# Altium PCB dc_power_module_v1.PcbDoc (part 3 of 4)
Units mm, origin at the board's own origin, x right, y up, seen from the top; angles counter-clockwise.
Board outline 83.82 x 73.41 mm, 2 copper layers (Top Layer, Bottom Layer); 37 components, 20 nets, 131 pads, 21 vias.
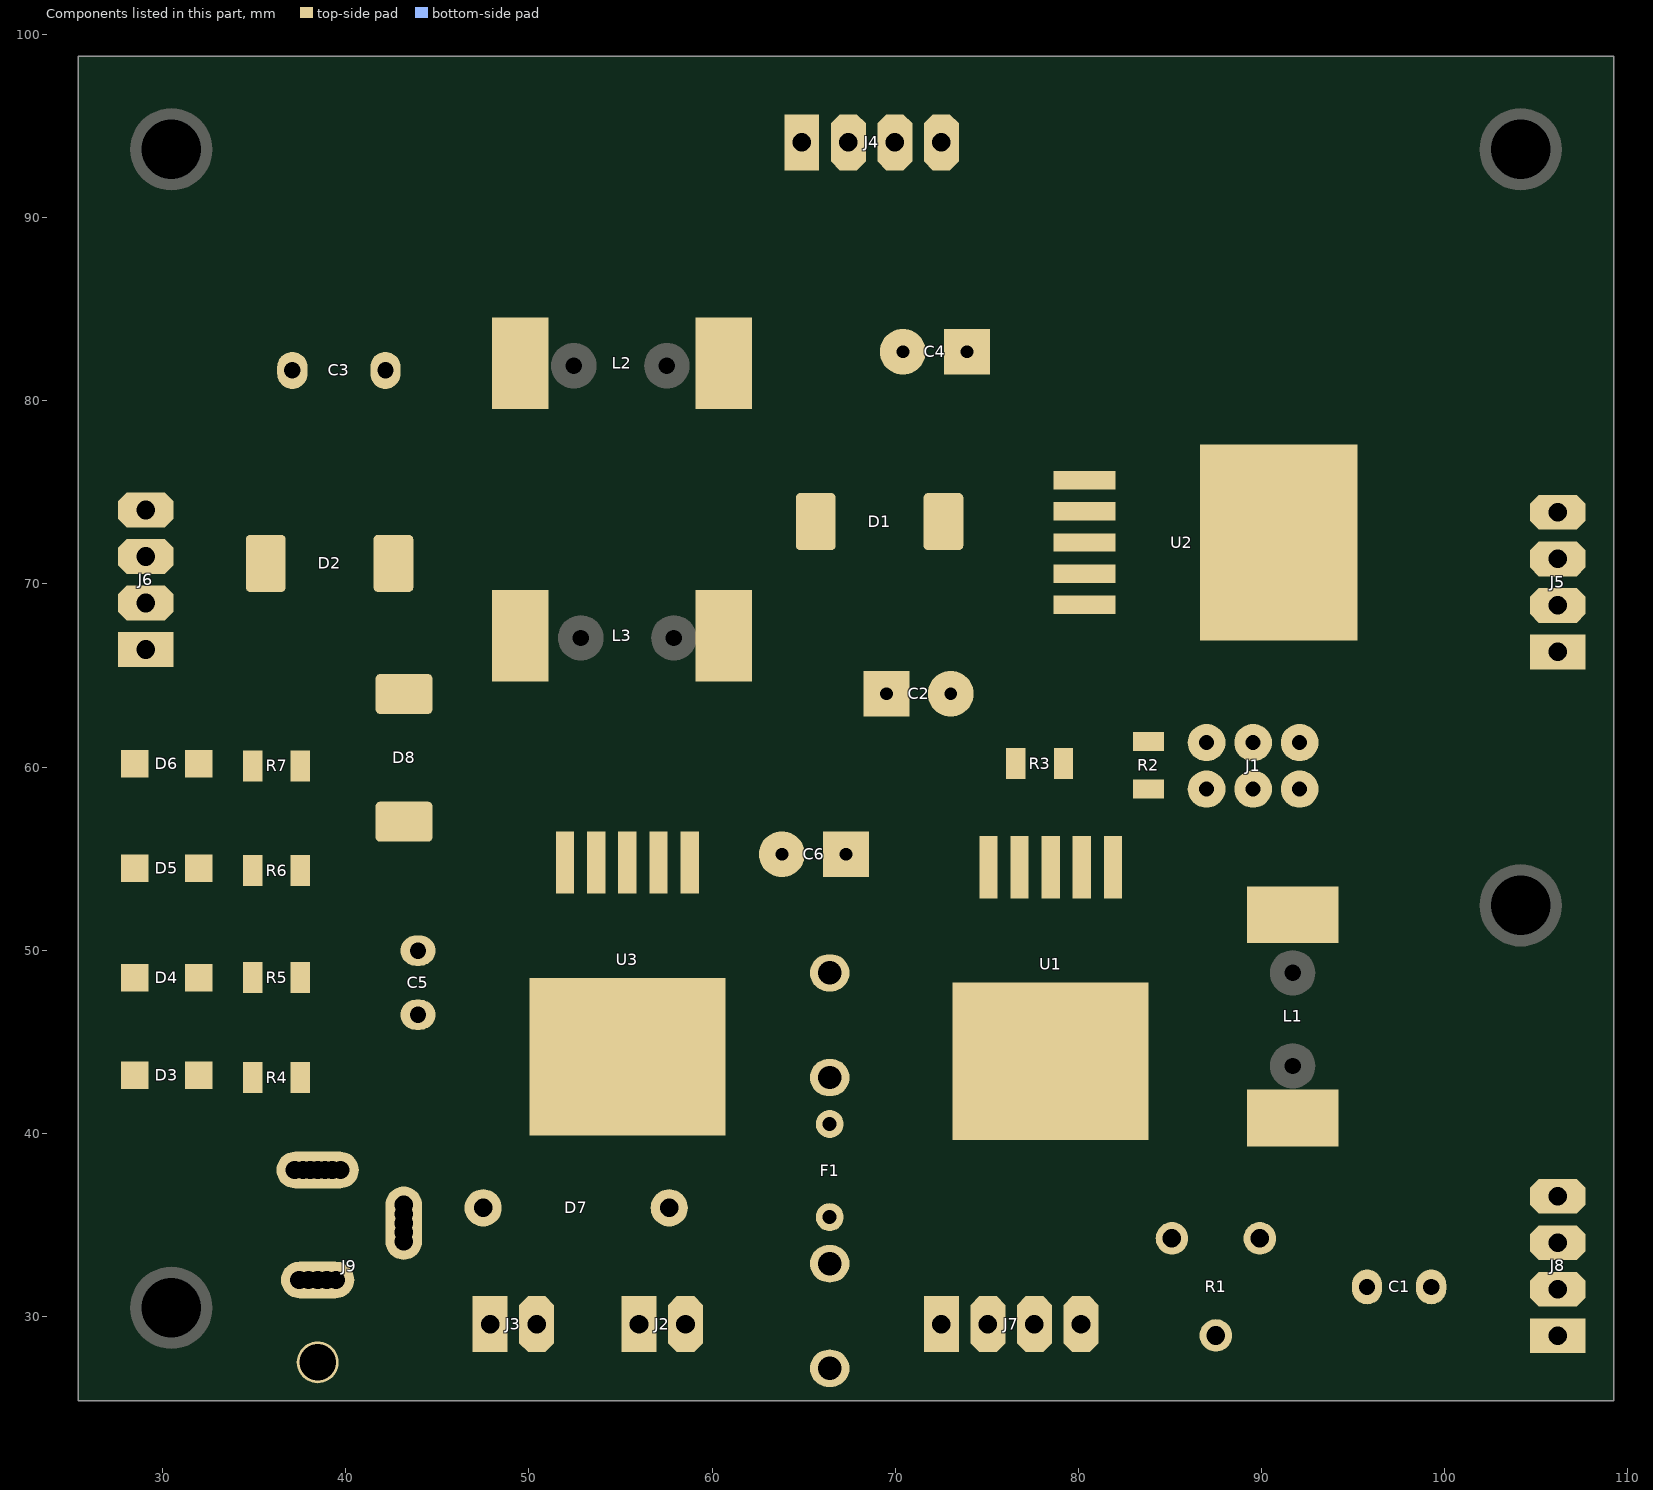
[diagram p3: the components of this part, seen from the top]

## Via types
v1: diameter 1.27, hole 0.711, Top Layer to Bottom Layer, 21 vias

## Nets (pads, with @x,y where several pads share a name; then routed paths per layer and width w, separated by ;. In a path a pad name is that pad's centre, name@x,y a point inside that pad or via, vN(x,y) a via of type N, cw(c..) or ccw(c..) an arc to the next point about the centre after c; other vN are vias at no path point) (continued)
copper on no net: (continued)
  Top Layer w0.008: 41.577,88.79 41.645,88.79 ; 41.577,88.988 41.699,88.988 ; 41.577,89.171 41.699,89.171 ; 41.577,89.254 41.706,89.254 ; 41.577,89.513 41.699,89.513 ; 41.577,89.696 41.699,89.696 ; 41.577,90.039 41.699,90.039 ; 41.577,90.222 41.699,90.222 ; 41.577,93.095 42.803,93.095 ; 41.577,95.823 41.699,95.823 ; 41.584,89.178 41.691,89.178 ; 41.584,89.247 41.691,89.247 ; 41.584,89.437 41.691,89.437 ; 41.584,89.772 41.691,89.772 ; 41.584,89.963 41.691,89.963 ; 41.584,95.83 41.706,95.83 ; 41.592,88.98 41.683,88.98 ; 41.592,89.506 41.683,89.506 ; 41.592,89.704 41.683,89.704 ; 41.592,90.032 41.691,90.032 ; 41.592,90.23 41.683,90.23 ; 41.592,95.838 41.714,95.838 ; 41.599,89.239 41.676,89.239 ; 41.599,89.445 41.676,89.445 ; 41.599,89.765 41.676,89.765 ; 41.599,89.971 41.676,89.971 ; 41.599,93.102 42.819,93.102 ; 41.599,95.846 41.721,95.846 ; 41.599,95.853 41.721,95.853 ; 41.607,89.186 41.668,89.186 ; 41.607,90.024 41.668,90.024 ; 41.607,92.371 43.451,92.371 ; 41.607,95.861 41.729,95.861 ; 41.615,89.498 41.66,89.498 ; 41.615,89.712 41.66,89.712 ; 41.615,90.237 41.66,90.237 ; 41.615,95.868 41.737,95.868 ; 41.622,95.876 41.744,95.876 ; 41.63,88.767 41.737,88.767 ; 41.63,93.11 42.834,93.11 ; 41.63,95.884 41.752,95.884 ; 41.63,95.891 41.76,95.891 ; 41.638,95.899 41.767,95.899 ; 41.645,95.907 41.775,95.907 ; 41.653,95.914 41.782,95.914 ; 41.66,88.759 41.737,88.759 ; 41.66,93.118 42.857,93.118 ; 41.66,95.922 41.79,95.922 ; 41.66,95.929 41.798,95.929 ; 41.668,88.469 41.706,88.469 ; 41.668,88.751 41.737,88.751 ; 41.668,95.937 41.805,95.937 ; 41.676,95.945 41.813,95.945 ; 41.683,88.477 41.714,88.477 ; 41.683,88.744 41.737,88.744 ; 41.683,93.125 42.872,93.125 ; 41.683,95.952 41.82,95.952 ; 41.691,88.485 41.721,88.485 ; 41.691,88.736 41.737,88.736 ; 41.691,92.379 43.489,92.379 ; 41.691,95.96 41.828,95.96 ; 41.699,88.492 41.729,88.492 ; 41.699,88.721 41.737,88.721 ; 41.699,88.729 41.737,88.729 ; 41.699,95.968 41.836,95.968 ; 41.699,95.975 41.843,95.975 ; 41.706,88.5 41.737,88.5 ; 41.706,88.713 41.737,88.713 ; 41.706,88.774 41.737,88.774 ; 41.706,95.983 41.851,95.983 ; 41.714,88.508 41.744,88.508 ; 41.714,88.698 41.737,88.698 ; 41.714,88.706 41.737,88.706 ; 41.714,88.782 41.737,88.782 ; 41.714,88.79 41.729,88.79 ; 41.714,93.133 42.887,93.133 ; 41.714,95.99 41.859,95.99 ; 41.721,88.515 41.744,88.515 ; 41.721,88.675 41.737,88.675 ; 41.721,88.683 41.737,88.683 ; 41.721,88.69 41.737,88.69 ; 41.721,95.998 41.866,95.998 ; 41.729,88.523 41.744,88.523 ; 41.729,88.53 41.737,88.53 ; 41.729,96.006 41.874,96.006 ; 41.737,93.141 42.903,93.141 ; 41.737,96.013 41.881,96.013 ; 41.744,96.021 41.889,96.021 ; 41.744,96.029 41.897,96.029 ; 41.752,96.036 41.904,96.036 ; 41.76,93.148 42.918,93.148 ; 41.76,96.044 41.912,96.044 ; 41.767,92.386 43.527,92.386 ; 41.767,96.051 41.92,96.051 ; 41.775,96.059 41.927,96.059 ; 41.782,96.067 41.942,96.067 ; 41.79,89.582 42.003,89.582 ; 41.79,89.59 42.011,89.59 ; 41.79,89.597 42.011,89.597 ; 41.79,89.605 42.011,89.605 ; 41.79,89.612 42.011,89.612 ; 41.79,89.62 42.011,89.62 ; 41.79,89.628 42.003,89.628 ; 41.79,90.108 42.003,90.108 ; 41.79,90.115 42.011,90.115 ; 41.79,90.123 42.011,90.123 ; 41.79,90.131 42.011,90.131 ; 41.79,90.138 42.011,90.138 ; 41.79,90.146 42.011,90.146 ; 41.79,90.153 42.003,90.153 ; 41.79,93.156 42.933,93.156 ; 41.79,96.074 41.95,96.074 ; 41.798,89.559 42.003,89.559 ; 41.798,89.567 42.003,89.567 ; 41.798,89.574 42.003,89.574 ; 41.798,89.635 42.003,89.635 ; 41.798,89.643 42.003,89.643 ; 41.798,89.651 42.003,89.651 ; 41.798,90.085 42.003,90.085 ; 41.798,90.093 42.003,90.093 ; 41.798,90.1 42.003,90.1 ; 41.798,90.161 42.003,90.161 ; 41.798,90.169 42.003,90.169 ; 41.798,90.176 42.003,90.176 ; 41.798,96.082 41.958,96.082 ; 41.805,89.544 41.988,89.544 ; 41.805,89.552 41.996,89.552 ; 41.805,89.658 41.996,89.658 ; 41.805,89.666 41.988,89.666 ; 41.805,90.07 41.996,90.07 ; 41.805,90.077 41.996,90.077 ; 41.805,90.184 41.996,90.184 ; 41.805,90.192 41.988,90.192 ; 41.805,96.089 41.965,96.089 ; 41.805,96.097 41.973,96.097 ; 41.813,89.536 41.988,89.536 ; 41.813,89.673 41.988,89.673 ; 41.813,90.062 41.988,90.062 ; 41.813,90.199 41.988,90.199 ; 41.813,93.163 42.948,93.163 ; 41.813,96.105 41.98,96.105 ; 41.82,89.529 41.98,89.529 ; 41.82,89.681 41.98,89.681 ; 41.82,90.054 41.98,90.054 ; 41.82,90.207 41.98,90.207 ; 41.82,96.112 41.988,96.112 ; 41.828,89.521 41.973,89.521 ; 41.828,89.689 41.973,89.689 ; 41.828,90.047 41.973,90.047 ; 41.828,90.214 41.973,90.214 ; 41.828,96.12 42.003,96.12 ; 41.836,89.513 41.965,89.513 ; 41.836,89.696 41.965,89.696 ; 41.836,90.039 41.965,90.039 ; 41.836,90.222 41.958,90.222 ; 41.836,92.394 43.558,92.394 ; 41.836,93.171 42.963,93.171 ; 41.836,96.128 42.011,96.128 ; 41.843,96.135 42.019,96.135 ; 41.851,89.506 41.95,89.506 ; 41.851,89.704 41.95,89.704 ; 41.851,90.032 41.95,90.032 ; 41.851,90.23 41.95,90.23 ; 41.851,96.143 42.026,96.143 ; 41.859,93.179 42.979,93.179 ; 41.859,96.15 42.034,96.15 ; 41.866,96.158 42.049,96.158 ; 41.874,89.498 41.927,89.498 ; 41.874,89.712 41.927,89.712 ; 41.874,90.024 41.927,90.024 ; 41.874,90.237 41.92,90.237 ; 41.874,96.166 42.057,96.166 ; 41.881,93.186 42.986,93.186 ; 41.881,96.173 42.064,96.173 ; 41.889,96.181 42.072,96.181 ; 41.897,92.401 43.596,92.401 ; 41.897,96.189 42.087,96.189 ; 41.904,93.194 43.002,93.194 ; 41.904,96.196 42.095,96.196 ; 41.912,96.204 42.102,96.204 ; 41.92,96.211 42.11,96.211 ; 41.927,93.201 43.017,93.201 ; 41.927,96.219 42.125,96.219 ; 41.935,96.227 42.133,96.227 ; 41.942,96.234 42.141,96.234 ; 41.95,93.209 43.032,93.209 ; 41.95,96.242 42.156,96.242 ; 41.958,92.409 43.626,92.409 ; 41.958,96.249 42.163,96.249 ; 41.965,96.257 42.171,96.257 ; 41.973,93.217 43.04,93.217 ; 41.973,96.265 42.186,96.265 ; 41.98,88.706 41.996,88.706 ; 41.98,88.713 41.996,88.713 ; 41.98,88.721 41.996,88.721 ; 41.98,88.729 42.003,88.729 ; 41.98,88.736 42.003,88.736 ; 41.98,88.744 42.011,88.744 ; 41.98,88.751 42.026,88.751 ; 41.98,88.759 42.262,88.759 ; 41.98,88.767 42.262,88.767 ; 41.98,88.774 42.262,88.774 ; 41.98,88.782 42.262,88.782 ; 41.98,96.272 42.194,96.272 ; 41.988,93.224 43.055,93.224 ; 41.988,96.28 42.201,96.28 ; 41.996,96.288 42.217,96.288 ; 42.003,96.295 42.224,96.295 ; 42.011,93.232 43.07,93.232 ; 42.011,96.303 42.24,96.303 ; 42.019,92.417 43.657,92.417 ; 42.019,96.31 42.247,96.31 ; 42.026,96.318 42.262,96.318 ; 42.034,93.24 43.078,93.24 ; 42.041,96.326 42.27,96.326 ; 42.049,89.597 42.27,89.597 ; 42.049,89.605 42.27,89.605 ; 42.049,89.612 42.27,89.612 ; 42.049,90.115 42.27,90.115 ; 42.049,90.123 42.27,90.123 ; 42.049,90.131 42.27,90.131 ; 42.049,90.138 42.27,90.138 ; 42.049,93.247 43.093,93.247 ; 42.049,96.333 42.278,96.333 ; 42.057,89.567 42.262,89.567 ; 42.057,89.574 42.262,89.574 ; 42.057,89.582 42.27,89.582 ; 42.057,89.59 42.27,89.59 ; 42.057,89.62 42.27,89.62 ; 42.057,89.628 42.27,89.628 ; 42.057,89.635 42.262,89.635 ; 42.057,89.643 42.262,89.643 ; 42.057,90.093 42.262,90.093 ; 42.057,90.1 42.262,90.1 ; 42.057,90.108 42.27,90.108 ; 42.057,90.146 42.27,90.146 ; 42.057,90.153 42.27,90.153 ; 42.057,90.161 42.262,90.161 ; 42.057,90.169 42.262,90.169 ; 42.057,96.341 42.293,96.341 ; 42.064,89.552 42.255,89.552 ; 42.064,89.559 42.262,89.559 ; 42.064,89.651 42.262,89.651 ; 42.064,89.658 42.255,89.658 ; 42.064,90.077 42.255,90.077 ; 42.064,90.085 42.262,90.085 ; 42.064,90.176 42.262,90.176 ; 42.064,90.184 42.255,90.184 ; 42.064,96.349 42.301,96.349 ; 42.072,89.536 42.247,89.536 ; 42.072,89.544 42.255,89.544 ; 42.072,89.666 42.255,89.666 ; 42.072,89.673 42.247,89.673 ; 42.072,90.062 42.247,90.062 ; 42.072,90.07 42.255,90.07 ; 42.072,90.192 42.255,90.192 ; 42.072,90.199 42.247,90.199 ; 42.072,92.424 43.687,92.424 ; 42.072,93.255 43.108,93.255 ; 42.072,96.356 42.316,96.356 ; 42.08,89.529 42.24,89.529 ; 42.08,89.681 42.24,89.681 ; 42.08,90.054 42.24,90.054 ; 42.08,90.207 42.24,90.207 ; 42.08,96.364 42.323,96.364 ; 42.087,88.469 42.148,88.469 ; 42.087,88.477 42.148,88.477 ; 42.087,88.485 42.148,88.485 ; 42.087,89.521 42.232,89.521 ; 42.087,89.689 42.232,89.689 ; 42.087,90.047 42.232,90.047 ; 42.087,90.214 42.232,90.214 ; 42.087,93.262 43.116,93.262 ; 42.087,96.371 42.339,96.371 ; 42.095,88.492 42.148,88.492 ; 42.095,88.5 42.148,88.5 ; 42.095,88.508 42.148,88.508 ; 42.095,88.515 42.148,88.515 ; 42.095,88.523 42.148,88.523 ; 42.095,88.53 42.148,88.53 ; 42.095,88.538 42.148,88.538 ; 42.095,88.546 42.148,88.546 ; 42.095,88.553 42.148,88.553 ; 42.095,88.561 42.148,88.561 ; 42.095,88.569 42.148,88.569 ; 42.095,88.576 42.148,88.576 ; 42.095,88.584 42.148,88.584 ; 42.095,88.591 42.148,88.591 ; 42.095,88.599 42.148,88.599 ; 42.095,88.607 42.148,88.607 ; 42.095,88.614 42.148,88.614 ; 42.095,88.622 42.148,88.622 ; 42.095,88.629 42.148,88.629 ; 42.095,88.637 42.148,88.637 ; 42.095,88.645 42.148,88.645 ; 42.095,88.652 42.148,88.652 ; 42.095,88.66 42.148,88.66 ; 42.095,88.668 42.148,88.668 ; 42.095,88.675 42.148,88.675 ; 42.095,88.683 42.148,88.683 ; 42.095,88.69 42.148,88.69 ; 42.095,88.698 42.148,88.698 ; 42.095,88.706 42.148,88.706 ; 42.095,88.713 42.148,88.713 ; 42.095,88.721 42.148,88.721 ; 42.095,88.729 42.148,88.729 ; 42.095,88.736 42.148,88.736 ; 42.095,88.744 42.148,88.744 ; 42.095,88.751 42.148,88.751 ; 42.095,90.039 42.224,90.039 ; 42.095,96.379 42.354,96.379 ; 42.102,89.513 42.224,89.513 ; 42.102,89.696 42.224,89.696 ; 42.102,90.222 42.224,90.222 ; 42.11,89.506 42.209,89.506 ; 42.11,89.704 42.209,89.704 ; 42.11,90.032 42.209,90.032 ; 42.11,90.23 42.209,90.23 ; 42.11,93.27 43.131,93.27 ; 42.11,96.387 42.361,96.387 ; 42.118,92.432 43.718,92.432 ; 42.118,96.394 42.377,96.394 ; 42.125,93.278 43.139,93.278 ; 42.125,94.268 42.255,94.268 ; 42.125,96.402 42.384,96.402 ; 42.133,89.498 42.186,89.498 ; 42.133,89.712 42.186,89.712 ; 42.133,90.024 42.186,90.024 ; 42.133,94.261 42.331,94.261 ; 42.133,96.41 42.4,96.41 ; 42.141,90.237 42.186,90.237 ; 42.141,93.285 43.146,93.285 ; 42.141,96.417 42.415,96.417 ; 42.148,94.253 42.384,94.253 ; 42.148,96.425 42.422,96.425 ; 42.163,93.293 43.162,93.293 ; 42.163,94.245 42.43,94.245 ; 42.163,96.432 42.438,96.432 ; 42.171,92.439 43.748,92.439 ; 42.171,96.44 42.453,96.44 ; 42.179,93.301 43.169,93.301 ; 42.179,96.448 42.461,96.448 ; 42.186,94.238 42.476,94.238 ; 42.186,96.455 42.476,96.455 ; 42.194,93.308 43.177,93.308 ; 42.201,94.23 42.514,94.23 ; 42.201,96.463 42.491,96.463 ; 42.209,93.316 43.192,93.316 ; 42.209,96.47 42.506,96.47 ; 42.217,88.751 42.262,88.751 ; 42.217,92.447 43.779,92.447 ; 42.217,94.223 42.552,94.223 ; 42.217,96.478 42.514,96.478 ; 42.224,88.744 42.262,88.744 ; 42.224,93.323 43.2,93.323 ; 42.224,96.486 42.529,96.486 ; 42.232,88.736 42.262,88.736 ; 42.24,88.721 42.262,88.721 ; 42.24,88.729 42.262,88.729 ; 42.24,93.331 43.207,93.331 ; 42.24,94.215 42.582,94.215 ; 42.24,96.493 42.544,96.493 ; 42.247,88.706 42.262,88.706 ; 42.247,88.713 42.262,88.713 ; 42.247,96.501 42.56,96.501 ; 42.255,93.339 43.223,93.339 ; 42.255,94.207 42.621,94.207 ; 42.255,96.509 42.575,96.509 ; 42.262,92.455 43.809,92.455 ; 42.27,93.346 43.23,93.346 ; 42.27,94.2 42.651,94.2 ; 42.27,96.516 42.59,96.516 ; 42.278,96.524 42.605,96.524 ; 42.285,93.354 43.238,93.354 ; 42.285,94.192 42.674,94.192 ; 42.285,96.531 42.621,96.531 ; 42.293,96.539 42.636,96.539 ; 42.301,93.362 43.245,93.362 ; 42.301,94.184 42.704,94.184 ; 42.308,92.462 43.84,92.462 ; 42.308,96.547 42.651,96.547 ; 42.316,89.498 42.864,89.498 ; 42.316,89.506 42.857,89.506 ; 42.316,89.513 42.849,89.513 ; 42.316,89.521 42.842,89.521 ; 42.316,89.529 42.834,89.529 ; 42.316,89.536 42.826,89.536 ; 42.316,89.544 42.819,89.544 ; 42.316,89.552 42.803,89.552 ; 42.316,89.559 42.796,89.559 ; 42.316,89.567 42.788,89.567 ; 42.316,89.574 42.773,89.574 ; 42.316,89.582 42.781,89.582 ; 42.316,89.59 42.796,89.59 ; 42.316,89.597 42.819,89.597 ; 42.316,89.605 42.834,89.605 ; 42.316,89.612 42.849,89.612 ; 42.316,89.62 42.864,89.62 ; 42.316,89.628 42.872,89.628 ; 42.316,89.635 42.887,89.635 ; 42.316,89.643 42.903,89.643 ; 42.316,89.651 42.91,89.651 ; 42.316,89.658 42.918,89.658 ; 42.316,89.666 42.933,89.666 ; 42.316,89.673 42.941,89.673 ; 42.316,89.681 42.948,89.681 ; 42.316,89.689 42.963,89.689 ; 42.316,89.696 42.971,89.696 ; 42.316,89.704 42.979,89.704 ; 42.316,89.712 42.986,89.712 ; 42.316,90.024 42.979,90.024 ; 42.316,90.032 42.971,90.032 ; 42.316,90.039 42.963,90.039 ; 42.316,90.047 42.956,90.047 ; 42.316,90.054 42.948,90.054 ; 42.316,90.062 42.941,90.062 ; 42.316,90.07 42.925,90.07 ; 42.316,90.077 42.918,90.077 ; 42.316,90.085 42.91,90.085 ; 42.316,90.093 42.895,90.093 ; 42.316,90.1 42.88,90.1 ; 42.316,90.108 42.872,90.108 ; 42.316,90.115 42.857,90.115 ; 42.316,90.123 42.842,90.123 ; 42.316,90.131 42.826,90.131 ; 42.316,90.138 42.811,90.138 ; 42.316,90.146 42.796,90.146 ; 42.316,90.153 42.773,90.153 ; 42.316,90.161 42.758,90.161 ; 42.316,90.169 42.735,90.169 ; 42.316,90.176 42.712,90.176 ; 42.316,90.184 42.689,90.184 ; 42.316,90.192 42.659,90.192 ; 42.316,90.199 42.628,90.199 ; 42.316,90.207 42.598,90.207 ; 42.316,90.214 42.56,90.214 ; 42.316,90.222 42.514,90.222 ; 42.316,90.23 42.461,90.23 ; 42.316,90.237 42.361,90.237 ; 42.316,93.369 43.253,93.369 ; 42.316,96.554 42.666,96.554 ; 42.323,94.177 42.735,94.177 ; 42.331,93.377 43.261,93.377 ; 42.331,96.562 42.682,96.562 ; 42.339,94.169 42.758,94.169 ; 42.339,96.57 42.697,96.57 ; 42.346,92.47 43.863,92.47 ; 42.346,93.384 43.268,93.384 ; 42.346,96.577 42.712,96.577 ; 42.354,93.392 43.276,93.392 ; 42.354,94.162 42.788,94.162 ; 42.361,96.585 42.727,96.585 ; 42.369,93.4 43.284,93.4 ; 42.369,94.154 42.811,94.154 ; 42.369,96.592 42.742,96.592 ; 42.377,89.491 42.872,89.491 ; 42.384,93.407 43.291,93.407 ; 42.384,94.146 42.834,94.146 ; 42.384,96.6 42.765,96.6 ; 42.392,92.478 43.893,92.478 ; 42.392,93.415 43.299,93.415 ; 42.392,96.608 42.781,96.608 ; 42.4,94.139 42.857,94.139 ; 42.4,96.615 42.796,96.615 ; 42.407,93.422 43.306,93.422 ; 42.415,94.131 42.88,94.131 ; 42.415,96.623 42.811,96.623 ; 42.422,90.016 42.986,90.016 ; 42.422,93.43 43.314,93.43 ; 42.422,96.63 42.834,96.63 ; 42.43,89.483 42.88,89.483 ; 42.43,89.719 42.994,89.719 ; 42.43,92.485 43.916,92.485 ; 42.43,93.438 43.322,93.438 ; 42.43,94.124 42.903,94.124 ; 42.438,96.638 42.849,96.638 ; 42.445,93.445 43.329,93.445 ; 42.445,94.116 42.925,94.116 ; 42.445,96.646 42.872,96.646 ; 42.453,93.453 43.337,93.453 ; 42.461,89.475 42.887,89.475 ; 42.461,94.108 42.948,94.108 ; 42.461,96.653 42.887,96.653 ; 42.468,92.493 43.939,92.493 ; 42.468,93.461 43.344,93.461 ; 42.476,93.468 43.352,93.468 ; 42.476,94.101 42.963,94.101 ; 42.476,96.661 42.91,96.661 ; 42.483,88.774 42.697,88.774 ; 42.483,88.782 42.666,88.782 ; 42.483,96.669 42.925,96.669 ; 42.491,89.468 42.895,89.468 ; 42.491,93.476 43.352,93.476 ; 42.491,94.093 42.986,94.093 ; 42.499,90.009 42.994,90.009 ; 42.499,93.483 43.36,93.483 ; 42.499,94.085 43.002,94.085 ; 42.499,96.676 42.948,96.676 ; 42.506,88.767 42.712,88.767 ; 42.506,92.5 43.969,92.5 ; 42.506,93.491 43.367,93.491 ; 42.506,96.684 42.963,96.684 ; 42.514,89.46 42.903,89.46 ; 42.514,89.727 42.994,89.727 ; 42.514,94.078 43.024,94.078 ; 42.522,88.469 42.59,88.469 ; 42.522,88.759 42.72,88.759 ; 42.522,93.499 43.375,93.499 ; 42.522,96.691 42.986,96.691 ; 42.529,88.477 42.59,88.477 ; 42.529,88.485 42.582,88.485 ; 42.529,88.492 42.582,88.492 ; 42.529,88.5 42.582,88.5 ; 42.529,88.508 42.582,88.508 ; 42.529,88.515 42.582,88.515 ; 42.529,88.523 42.582,88.523 ; 42.529,88.53 42.582,88.53 ; 42.529,88.538 42.582,88.538 ; 42.529,88.546 42.582,88.546 ; 42.529,88.553 42.582,88.553 ; 42.529,88.561 42.582,88.561 ; 42.529,88.569 42.582,88.569 ; 42.529,88.576 42.582,88.576 ; 42.529,88.584 42.582,88.584 ; 42.529,88.591 42.582,88.591 ; 42.529,88.599 42.674,88.599 ; 42.529,88.607 42.682,88.607 ; 42.529,88.614 42.697,88.614 ; 42.529,88.622 42.582,88.622 ; 42.529,88.629 42.582,88.629 ; 42.529,88.637 42.582,88.637 ; 42.529,88.645 42.582,88.645 ; 42.529,88.652 42.582,88.652 ; 42.529,88.66 42.582,88.66 ; 42.529,88.668 42.582,88.668 ; 42.529,88.675 42.582,88.675 ; 42.529,88.683 42.582,88.683 ; 42.529,88.69 42.582,88.69 ; 42.529,88.698 42.582,88.698 ; 42.529,88.706 42.582,88.706 ; 42.529,88.713 42.582,88.713 ; 42.529,88.721 42.582,88.721 ; 42.529,88.729 42.582,88.729 ; 42.529,88.736 42.582,88.736 ; 42.529,88.744 42.582,88.744 ; 42.529,88.751 42.582,88.751 ; 42.529,89.452 42.91,89.452 ; 42.529,93.506 43.375,93.506 ; 42.529,94.07 43.04,94.07 ; 42.529,96.699 43.009,96.699 ; 42.537,93.514 43.383,93.514 ; 42.537,94.063 43.063,94.063 ; 42.544,92.508 43.992,92.508 ; 42.544,93.522 43.39,93.522 ; 42.544,96.707 43.032,96.707 ; 42.552,89.445 42.918,89.445 ; 42.552,90.001 43.002,90.001 ; 42.552,94.055 43.078,94.055 ; 42.56,93.529 43.39,93.529 ; 42.56,94.047 43.093,94.047 ; 42.56,96.714 43.055,96.714 ; 42.567,89.437 42.925,89.437 ; 42.567,89.734 43.002,89.734 ; 42.567,93.537 43.398,93.537 ; 42.567,96.722 43.078,96.722 ; 42.575,92.516 44.015,92.516 ; 42.575,93.544 43.398,93.544 ; 42.575,94.04 43.108,94.04 ; 42.582,89.43 42.925,89.43 ; 42.582,93.552 43.405,93.552 ; 42.582,94.032 43.123,94.032 ; 42.582,96.73 43.101,96.73 ; 42.59,93.56 43.405,93.56 ; 42.59,94.024 43.139,94.024 ; 42.598,89.422 42.933,89.422 ; 42.598,89.993 43.009,89.993 ; 42.598,93.567 43.413,93.567 ; 42.598,96.737 43.123,96.737 ; 42.605,89.742 43.009,89.742 ; 42.605,93.575 43.413,93.575 ; 42.605,94.017 43.154,94.017 ; 42.613,88.591 42.682,88.591 ; 42.613,88.622 42.712,88.622 ; 42.613,89.414 42.941,89.414 ; 42.613,92.523 44.038,92.523 ; 42.613,93.582 43.413,93.582 ; 42.613,94.009 43.169,94.009 ; 42.613,96.745 43.146,96.745 ; 42.621,88.584 42.689,88.584 ; 42.621,89.407 42.948,89.407 ; 42.621,93.59 43.421,93.59 ; 42.621,94.002 43.184,94.002 ; 42.621,96.752 43.177,96.752 ; 42.628,88.576 42.689,88.576 ; 42.628,89.986 43.009,89.986 ; 42.628,93.598 43.421,93.598 ; 42.628,93.994 43.2,93.994 ; 42.636,88.561 42.704,88.561 ; 42.636,88.569 42.697,88.569 ; 42.636,89.399 42.948,89.399 ; 42.636,93.605 43.421,93.605 ; 42.636,93.986 43.207,93.986 ; 42.636,96.76 43.2,96.76 ; 42.643,88.553 42.712,88.553 ; 42.643,88.629 42.727,88.629 ; 42.643,89.75 43.017,89.75 ; 42.643,92.531 44.061,92.531 ; 42.643,93.613 43.428,93.613 ; 42.643,93.979 43.223,93.979 ; 42.651,88.538 42.72,88.538 ; 42.651,88.546 42.712,88.546 ; 42.651,88.751 42.727,88.751 ; 42.651,89.391 42.956,89.391 ; 42.651,93.621 43.428,93.621 ; 42.651,93.971 43.23,93.971 ; 42.651,96.768 43.23,96.768 ; 42.659,88.53 42.727,88.53 ; 42.659,88.637 42.727,88.637 ; 42.659,88.744 42.735,88.744 ; 42.659,89.384 42.963,89.384 ; 42.659,89.978 43.017,89.978 ; 42.659,93.628 43.428,93.628 ; 42.659,93.963 43.245,93.963 ; 42.666,88.523 42.727,88.523 ; 42.666,88.645 42.735,88.645 ; 42.666,89.376 42.963,89.376 ; 42.666,89.757 43.017,89.757 ; 42.666,93.636 43.428,93.636 ; 42.666,93.956 43.253,93.956 ; 42.666,96.775 43.253,96.775 ; 42.674,88.508 42.742,88.508 ; 42.674,88.515 42.735,88.515 ; 42.674,88.652 42.742,88.652 ; 42.674,88.729 42.742,88.729 ; 42.674,88.736 42.742,88.736 ; 42.674,93.643 43.428,93.643 ; 42.674,93.651 43.436,93.651 ; 42.674,93.948 43.268,93.948 ; 42.674,96.783 43.284,96.783 ; 42.682,88.5 42.75,88.5 ; 42.682,88.66 42.742,88.66 ; 42.682,88.668 42.75,88.668 ; 42.682,88.675 42.75,88.675 ; 42.682,88.713 42.75,88.713 ; 42.682,88.721 42.75,88.721 ; 42.682,89.369 42.971,89.369 ; 42.682,92.539 44.084,92.539 ; 42.682,93.659 43.436,93.659 ; 42.682,93.941 43.276,93.941 ; 42.689,88.485 42.758,88.485 ; 42.689,88.492 42.75,88.492 ; 42.689,88.683 42.75,88.683 ; 42.689,88.69 42.75,88.69 ; 42.689,88.698 42.75,88.698 ; 42.689,88.706 42.75,88.706 ; 42.689,89.361 42.979,89.361 ; 42.689,89.971 43.024,89.971 ; 42.689,93.666 43.436,93.666 ; 42.689,93.674 43.436,93.674 ; 42.689,93.925 43.299,93.925 ; 42.689,93.933 43.284,93.933 ; 42.689,96.791 43.314,96.791 ; 42.697,88.477 42.765,88.477 ; 42.697,89.353 42.979,89.353 ; 42.697,89.765 43.024,89.765 ; 42.697,93.682 43.436,93.682 ; 42.697,93.918 43.306,93.918 ; 42.704,88.469 42.781,88.469 ; 42.704,89.346 42.986,89.346 ; 42.704,93.689 43.436,93.689 ; 42.704,93.697 43.436,93.697 ; 42.704,93.903 43.322,93.903 ; 42.704,93.91 43.314,93.91 ; 42.704,96.798 43.352,96.798 ; 42.712,89.338 42.986,89.338 ; 42.712,89.963 43.024,89.963 ; 42.712,92.546 44.106,92.546 ; 42.712,93.704 43.428,93.704 ; 42.712,93.712 43.428,93.712 ; 42.712,93.887 43.337,93.887 ; 42.712,93.895 43.329,93.895 ; 42.72,89.331 42.994,89.331 ; 42.72,89.772 43.032,89.772 ; 42.72,93.72 43.428,93.72 ; 42.72,93.727 43.428,93.727 ; 42.72,93.735 43.428,93.735 ; 42.72,93.872 43.352,93.872 ; 42.72,93.88 43.344,93.88 ; 42.72,96.806 43.383,96.806 ; 42.727,89.323 42.994,89.323 ; 42.727,89.955 43.032,89.955 ; 42.727,93.743 43.421,93.743 ; 42.727,93.75 43.421,93.75 ; 42.727,93.758 43.421,93.758 ; 42.727,93.849 43.367,93.849 ; 42.727,93.857 43.36,93.857 ; 42.727,93.864 43.352,93.864 ; 42.735,89.315 43.002,89.315 ; 42.735,89.78 43.032,89.78 ; 42.735,93.765 43.413,93.765 ; 42.735,93.773 43.413,93.773 ; 42.735,93.781 43.413,93.781 ; 42.735,93.788 43.405,93.788 ; 42.735,93.796 43.405,93.796 ; 42.735,93.803 43.398,93.803 ; 42.735,93.811 43.39,93.811 ; 42.735,93.819 43.39,93.819 ; 42.735,93.826 43.383,93.826 ; 42.735,93.834 43.375,93.834 ; 42.735,93.842 43.375,93.842 ; 42.735,96.813 43.421,96.813 ; 42.742,89.308 43.002,89.308 ; 42.742,92.554 44.122,92.554 ; 42.75,89.3 43.009,89.3 ; 42.75,89.948 43.032,89.948 ; 42.75,96.821 43.459,96.821 ; 42.758,89.292 43.009,89.292 ; 42.758,89.788 43.032,89.788 ; 42.765,89.277 43.017,89.277 ; 42.765,89.285 43.017,89.285 ; 42.765,89.795 43.04,89.795 ; 42.765,89.94 43.04,89.94 ; 42.765,96.829 43.497,96.829 ; 42.773,89.27 43.017,89.27 ; 42.773,92.561 44.145,92.561 ; 42.781,89.254 43.024,89.254 ; 42.781,89.262 43.024,89.262 ; 42.781,89.803 43.04,89.803 ; 42.781,89.933 43.04,89.933 ; 42.781,96.836 43.543,96.836 ; 42.788,89.239 43.032,89.239 ; 42.788,89.247 43.024,89.247 ; 42.788,89.925 43.04,89.925 ; 42.796,89.224 43.032,89.224 ; 42.796,89.231 43.032,89.231 ; 42.796,89.811 43.047,89.811 ; 42.796,96.844 43.588,96.844 ; 42.803,89.209 43.04,89.209 ; 42.803,89.216 43.032,89.216 ; 42.803,89.818 43.047,89.818 ; 42.803,89.917 43.047,89.917 ; 42.803,92.569 44.167,92.569 ; 42.811,89.193 43.04,89.193 ; 42.811,89.201 43.04,89.201 ; 42.811,89.826 43.047,89.826 ; 42.811,89.91 43.047,89.91 ; 42.811,96.851 43.642,96.851 ; 42.819,89.171 43.047,89.171 ; 42.819,89.178 43.04,89.178 ; 42.819,89.186 43.04,89.186 ; 42.819,89.833 43.047,89.833 ; 42.819,89.902 43.047,89.902 ; 42.826,89.132 43.047,89.132 ; 42.826,89.14 43.047,89.14 ; 42.826,89.148 43.047,89.148 ; 42.826,89.155 43.047,89.155 ; 42.826,89.163 43.047,89.163 ; 42.826,89.841 43.047,89.841 ; 42.826,89.849 43.047,89.849 ; 42.826,89.887 43.047,89.887 ; 42.826,89.894 43.047,89.894 ; 42.826,92.058 43.474,92.058 ; 42.826,96.859 43.71,96.859 ; 42.834,88.972 43.047,88.972 ; 42.834,88.98 43.047,88.98 ; 42.834,88.988 43.047,88.988 ; 42.834,88.995 43.047,88.995 ; 42.834,89.003 43.047,89.003 ; 42.834,89.01 43.047,89.01 ; 42.834,89.018 43.047,89.018 ; 42.834,89.026 43.047,89.026 ; 42.834,89.033 43.047,89.033 ; 42.834,89.041 43.047,89.041 ; 42.834,89.049 43.047,89.049 ; 42.834,89.056 43.047,89.056 ; 42.834,89.064 43.047,89.064 ; 42.834,89.071 43.047,89.071 ; 42.834,89.079 43.047,89.079 ; 42.834,89.087 43.047,89.087 ; 42.834,89.094 43.047,89.094 ; 42.834,89.102 43.047,89.102 ; 42.834,89.11 43.047,89.11 ; 42.834,89.117 43.047,89.117 ; 42.834,89.125 43.047,89.125 ; 42.834,89.856 43.047,89.856 ; 42.834,89.864 43.047,89.864 ; 42.834,89.872 43.047,89.872 ; 42.834,89.879 43.047,89.879 ; 42.834,92.577 44.183,92.577 ; 42.842,96.867 43.794,96.867 ; 42.857,96.874 45.295,96.874 ; 42.864,92.066 43.543,92.066 ; 42.864,92.584 44.206,92.584 ; 42.872,92.051 43.398,92.051 ; 42.872,96.882 45.288,96.882 ; 42.895,92.592 44.221,92.592 ; 42.895,96.89 45.272,96.89 ; 42.91,96.897 45.257,96.897 ; 42.925,92.6 44.244,92.6 ; 42.925,96.905 45.242,96.905 ; 42.933,92.074 43.596,92.074 ; 42.941,96.912 45.227,96.912 ; 42.956,92.607 44.259,92.607 ; 42.963,96.92 45.211,96.92 ; 42.979,92.615 44.282,92.615 ; 42.979,96.928 45.196,96.928 ; 42.994,92.043 43.284,92.043 ; 43.002,96.935 45.181,96.935 ; 43.009,92.081 43.642,92.081 ; 43.009,92.622 44.297,92.622 ; 43.017,96.943 45.166,96.943 ; 43.032,88.569 43.101,88.569 ; 43.032,88.576 43.101,88.576 ; 43.032,88.584 43.093,88.584 ; 43.032,88.591 43.093,88.591 ; 43.032,88.599 43.093,88.599 ; 43.032,88.607 43.093,88.607 ; 43.032,88.614 43.093,88.614 ; 43.032,88.622 43.093,88.622 ; 43.032,88.629 43.093,88.629 ; 43.032,88.637 43.093,88.637 ; 43.032,88.645 43.093,88.645 ; 43.032,88.652 43.101,88.652 ; 43.032,88.66 43.101,88.66 ; 43.032,92.63 44.312,92.63 ; 43.04,88.538 43.108,88.538 ; 43.04,88.546 43.101,88.546 ; 43.04,88.553 43.101,88.553 ; 43.04,88.561 43.101,88.561 ; 43.04,88.668 43.101,88.668 ; 43.04,88.675 43.101,88.675 ; 43.04,88.683 43.101,88.683 ; 43.04,96.951 45.143,96.951 ; 43.047,88.523 43.108,88.523 ; 43.047,88.53 43.108,88.53 ; 43.047,88.69 43.108,88.69 ; 43.047,88.698 43.108,88.698 ; 43.055,88.508 43.116,88.508 ; 43.055,88.515 43.116,88.515 ; 43.055,88.706 43.108,88.706 ; 43.055,88.713 43.116,88.713 ; 43.055,92.638 44.327,92.638 ; 43.055,96.958 45.128,96.958 ; 43.063,88.5 43.123,88.5 ; 43.063,88.721 43.123,88.721 ; 43.07,88.492 43.131,88.492 ; 43.07,88.729 43.123,88.729 ; 43.07,92.089 43.687,92.089 ; 43.078,88.485 43.131,88.485 ; 43.078,88.736 43.131,88.736 ; 43.078,88.744 43.139,88.744 ; 43.078,96.966 45.112,96.966 ; 43.085,88.477 43.146,88.477 ; 43.085,88.751 43.146,88.751 ; 43.085,92.645 44.343,92.645 ; 43.093,88.469 43.154,88.469 ; 43.101,88.759 43.162,88.759 ; 43.101,96.973 45.089,96.973 ; 43.108,88.767 43.192,88.767 ; 43.108,92.653 44.358,92.653 ; 43.116,96.981 45.074,96.981 ; 43.123,88.774 43.276,88.774 ; 43.131,92.097 43.733,92.097 ; 43.131,92.66 44.373,92.66 ; 43.139,88.782 43.261,88.782 ; 43.139,96.989 45.051,96.989 ; 43.146,89.056 43.36,89.056 ; 43.146,89.064 43.367,89.064 ; 43.146,89.071 43.367,89.071 ; 43.146,89.079 43.367,89.079 ; 43.146,89.087 43.367,89.087 ; 43.146,89.094 43.367,89.094 ; 43.146,89.102 43.36,89.102 ; 43.146,90.108 43.36,90.108 ; 43.146,90.115 43.367,90.115 ; 43.146,90.123 43.367,90.123 ; 43.146,90.131 43.367,90.131 ; 43.146,90.138 43.367,90.138 ; 43.146,90.146 43.367,90.146 ; 43.146,90.153 43.36,90.153 ; 43.154,89.033 43.352,89.033 ; 43.154,89.041 43.36,89.041 ; 43.154,89.049 43.36,89.049 ; 43.154,89.11 43.36,89.11 ; 43.154,89.117 43.36,89.117 ; 43.154,89.125 43.36,89.125 ; 43.154,90.085 43.36,90.085 ; 43.154,90.093 43.36,90.093 ; 43.154,90.1 43.36,90.1 ; 43.154,90.161 43.36,90.161 ; 43.154,90.169 43.36,90.169 ; 43.154,90.176 43.36,90.176 ; 43.154,92.668 44.388,92.668 ; 43.162,88.79 43.238,88.79 ; 43.162,89.026 43.352,89.026 ; 43.162,89.132 43.352,89.132 ; 43.162,89.14 43.352,89.14 ; 43.162,90.07 43.352,90.07 ; 43.162,90.077 43.352,90.077 ; 43.162,90.184 43.352,90.184 ; 43.162,90.192 43.344,90.192 ; 43.162,96.996 45.036,96.996 ; 43.169,89.01 43.337,89.01 ; 43.169,89.018 43.344,89.018 ; 43.169,89.148 43.344,89.148 ; 43.169,90.062 43.344,90.062 ; 43.169,90.199 43.344,90.199 ; 43.177,89.003 43.337,89.003 ; 43.177,89.155 43.337,89.155 ; 43.177,90.054 43.337,90.054 ; 43.177,90.207 43.337,90.207 ; 43.177,92.676 44.404,92.676 ; 43.184,88.995 43.322,88.995 ; 43.184,89.163 43.329,89.163 ; 43.184,90.047 43.329,90.047 ; 43.184,90.214 43.329,90.214 ; 43.184,97.004 45.013,97.004 ; 43.192,89.171 43.322,89.171 ; 43.192,90.039 43.322,90.039 ; 43.192,90.222 43.314,90.222 ; 43.192,92.104 43.771,92.104 ; 43.2,88.988 43.314,88.988 ; 43.2,89.178 43.306,89.178 ; 43.2,92.683 44.419,92.683 ; 43.207,88.767 43.291,88.767 ; 43.207,90.032 43.306,90.032 ; 43.207,90.23 43.306,90.23 ; 43.207,97.011 44.998,97.011 ; 43.215,88.98 43.299,88.98 ; 43.223,89.186 43.291,89.186 ; 43.223,92.691 44.434,92.691 ; 43.23,90.024 43.284,90.024 ; 43.23,90.237 43.276,90.237 ; 43.23,97.019 44.975,97.019 ; 43.238,88.759 43.299,88.759 ; 43.245,88.469 43.306,88.469 ; 43.245,92.112 43.802,92.112 ; 43.245,92.699 44.449,92.699 ; 43.253,88.477 43.314,88.477 ; 43.253,88.751 43.306,88.751 ; 43.253,97.027 44.952,97.027 ; 43.261,88.485 43.322,88.485 ; 43.261,88.744 43.314,88.744 ; 43.268,88.492 43.329,88.492 ; 43.268,88.736 43.322,88.736 ; 43.268,92.706 44.457,92.706 ; 43.276,88.5 43.329,88.5 ; 43.276,88.721 43.337,88.721 ; 43.276,88.729 43.329,88.729 ; 43.276,97.034 44.929,97.034 ; 43.284,88.508 43.337,88.508 ; 43.284,88.515 43.344,88.515 ; 43.284,88.523 43.344,88.523 ; 43.284,88.706 43.344,88.706 ; 43.284,88.713 43.337,88.713 ; 43.284,92.714 44.472,92.714 ; 43.291,88.53 43.352,88.53 ; 43.291,88.538 43.352,88.538 ; 43.291,88.546 43.352,88.546 ; 43.291,88.683 43.352,88.683 ; 43.291,88.69 43.352,88.69 ; 43.291,88.698 43.344,88.698 ; 43.299,88.553 43.36,88.553 ; 43.299,88.561 43.36,88.561 ; 43.299,88.569 43.36,88.569 ; 43.299,88.576 43.36,88.576 ; 43.299,88.584 43.367,88.584 ; 43.299,88.591 43.367,88.591 ; 43.299,88.599 43.367,88.599 ; 43.299,88.607 43.367,88.607 ; 43.299,88.614 43.367,88.614 ; 43.299,88.622 43.367,88.622 ; 43.299,88.629 43.367,88.629 ; 43.299,88.637 43.367,88.637 ; 43.299,88.645 43.367,88.645 ; 43.299,88.652 43.36,88.652 ; 43.299,88.66 43.36,88.66 ; 43.299,88.668 43.36,88.668 ; 43.299,88.675 43.36,88.675 ; 43.299,92.119 43.84,92.119 ; 43.299,97.042 44.907,97.042 ; 43.306,92.721 44.487,92.721 ; 43.329,92.729 44.495,92.729 ; 43.329,97.05 44.884,97.05 ; 43.344,92.127 43.87,92.127 ; 43.344,92.737 44.51,92.737 ; 43.352,97.057 44.853,97.057 ; 43.367,92.744 44.518,92.744 ; 43.383,94.284 43.39,94.284 ; 43.383,94.291 43.398,94.291 ; 43.383,97.065 44.83,97.065 ; 43.39,92.752 44.533,92.752 ; 43.39,94.299 43.405,94.299 ; 43.398,92.135 43.901,92.135 ; 43.398,94.306 43.421,94.306 ; 43.405,92.76 44.541,92.76 ; 43.413,88.98 43.832,88.98 ; 43.413,88.988 43.832,88.988 ; 43.413,88.995 43.832,88.995 ; 43.413,89.003 43.832,89.003 ; 43.413,89.01 43.832,89.01 ; 43.413,89.018 43.832,89.018 ; 43.413,89.026 43.832,89.026 ; 43.413,89.033 43.832,89.033 ; 43.413,89.041 43.832,89.041 ; 43.413,89.049 43.832,89.049 ; 43.413,89.056 43.832,89.056 ; 43.413,89.064 43.832,89.064 ; 43.413,89.071 43.832,89.071 ; 43.413,89.079 43.832,89.079 ; 43.413,89.087 43.832,89.087 ; 43.413,89.094 43.832,89.094 ; 43.413,89.102 43.832,89.102 ; 43.413,89.11 43.832,89.11 ; 43.413,89.117 43.832,89.117 ; 43.413,89.125 43.832,89.125 ; 43.413,89.132 43.832,89.132 ; 43.413,89.14 43.832,89.14 ; 43.413,89.148 43.832,89.148 ; 43.413,89.155 43.832,89.155 ; 43.413,89.163 43.832,89.163 ; 43.413,89.171 43.832,89.171 ; 43.413,89.178 43.832,89.178 ; 43.413,89.186 43.832,89.186 ; 43.413,89.193 43.626,89.193 ; 43.413,89.201 43.626,89.201 ; 43.413,89.209 43.626,89.209 ; 43.413,89.216 43.626,89.216 ; 43.413,89.224 43.626,89.224 ; 43.413,89.231 43.626,89.231 ; 43.413,89.239 43.626,89.239 ; 43.413,89.247 43.626,89.247 ; 43.413,89.254 43.626,89.254 ; 43.413,89.262 43.626,89.262 ; 43.413,89.27 43.626,89.27 ; 43.413,89.277 43.626,89.277 ; 43.413,89.285 43.626,89.285 ; 43.413,89.292 43.626,89.292 ; 43.413,89.3 43.626,89.3 ; 43.413,89.308 43.626,89.308 ; 43.413,89.315 43.626,89.315 ; 43.413,89.323 43.626,89.323 ; 43.413,89.331 43.626,89.331 ; 43.413,89.338 43.626,89.338 ; 43.413,89.346 43.626,89.346 ; 43.413,89.353 43.626,89.353 ; 43.413,89.361 43.626,89.361 ; 43.413,89.369 43.626,89.369 ; 43.413,89.376 43.626,89.376 ; 43.413,89.384 43.626,89.384 ; 43.413,89.391 43.626,89.391 ; 43.413,89.399 43.626,89.399 ; 43.413,89.407 43.626,89.407 ; 43.413,89.414 43.626,89.414 ; 43.413,89.422 43.626,89.422 ; 43.413,89.43 43.626,89.43 ; 43.413,89.437 43.626,89.437 ; 43.413,89.445 43.626,89.445 ; 43.413,89.452 43.626,89.452 ; 43.413,89.46 43.626,89.46 ; 43.413,89.468 43.626,89.468 ; 43.413,89.475 43.626,89.475 ; 43.413,89.483 43.626,89.483 ; 43.413,89.491 43.626,89.491 ; 43.413,89.498 43.626,89.498 ; 43.413,89.506 43.626,89.506 ; 43.413,89.513 43.626,89.513 ; 43.413,89.521 43.626,89.521 ; 43.413,89.529 43.626,89.529 ; 43.413,89.536 43.626,89.536 ; 43.413,89.544 43.626,89.544 ; 43.413,89.552 43.626,89.552 ; 43.413,89.559 43.626,89.559 ; 43.413,89.567 43.626,89.567 ; 43.413,89.574 43.626,89.574 ; 43.413,89.582 43.626,89.582 ; 43.413,89.59 43.626,89.59 ; 43.413,89.597 43.626,89.597 ; 43.413,89.605 43.626,89.605 ; 43.413,89.612 43.626,89.612 ; 43.413,89.62 43.626,89.62 ; 43.413,89.628 43.626,89.628 ; 43.413,89.635 43.626,89.635 ; 43.413,89.643 43.626,89.643 ; 43.413,89.651 43.626,89.651 ; 43.413,89.658 43.626,89.658 ; 43.413,89.666 43.626,89.666 ; 43.413,89.673 43.626,89.673 ; 43.413,89.681 43.626,89.681 ; 43.413,89.689 43.626,89.689 ; 43.413,89.696 43.626,89.696 ; 43.413,89.704 43.626,89.704 ; 43.413,89.712 43.626,89.712 ; 43.413,89.719 43.626,89.719 ; 43.413,89.727 43.626,89.727 ; 43.413,89.734 43.626,89.734 ; 43.413,89.742 43.626,89.742 ; 43.413,89.75 43.626,89.75 ; 43.413,89.757 43.626,89.757 ; 43.413,89.765 43.626,89.765 ; 43.413,89.772 43.626,89.772 ; 43.413,89.78 43.626,89.78 ; 43.413,89.788 43.626,89.788 ; 43.413,89.795 43.626,89.795 ; 43.413,89.803 43.626,89.803 ; 43.413,89.811 43.626,89.811 ; 43.413,89.818 43.626,89.818 ; 43.413,89.826 43.626,89.826 ; 43.413,89.833 43.626,89.833 ; 43.413,89.841 43.626,89.841 ; 43.413,89.849 43.626,89.849 ; 43.413,89.856 43.626,89.856 ; 43.413,89.864 43.626,89.864 ; 43.413,89.872 43.626,89.872 ; 43.413,89.879 43.626,89.879 ; 43.413,89.887 43.626,89.887 ; 43.413,89.894 43.626,89.894 ; 43.413,89.902 43.626,89.902 ; 43.413,89.91 43.626,89.91 ; 43.413,89.917 43.626,89.917 ; 43.413,89.925 43.626,89.925 ; 43.413,89.933 43.626,89.933 ; 43.413,89.94 43.626,89.94 ; 43.413,89.948 43.626,89.948 ; 43.413,89.955 43.626,89.955 ; 43.413,89.963 43.626,89.963 ; 43.413,89.971 43.626,89.971 ; 43.413,89.978 43.626,89.978 ; 43.413,89.986 43.626,89.986 ; 43.413,89.993 43.626,89.993 ; 43.413,90.001 43.626,90.001 ; 43.413,90.009 43.626,90.009 ; 43.413,90.016 43.626,90.016 ; 43.413,90.024 43.832,90.024 ; 43.413,90.032 43.832,90.032 ; 43.413,90.039 43.832,90.039 ; 43.413,90.047 43.832,90.047 ; 43.413,90.054 43.832,90.054 ; 43.413,90.062 43.832,90.062 ; 43.413,90.07 43.832,90.07 ; 43.413,90.077 43.832,90.077 ; 43.413,90.085 43.832,90.085 ; 43.413,90.093 43.832,90.093 ; 43.413,90.1 43.832,90.1 ; 43.413,90.108 43.832,90.108 ; 43.413,90.115 43.832,90.115 ; 43.413,90.123 43.832,90.123 ; 43.413,90.131 43.832,90.131 ; 43.413,90.138 43.832,90.138 ; 43.413,90.146 43.832,90.146 ; 43.413,90.153 43.832,90.153 ; 43.413,90.161 43.832,90.161 ; 43.413,90.169 43.832,90.169 ; 43.413,90.176 43.832,90.176 ; 43.413,90.184 43.832,90.184 ; 43.413,90.192 43.832,90.192 ; 43.413,90.199 43.832,90.199 ; 43.413,90.207 43.832,90.207 ; 43.413,90.214 43.832,90.214 ; 43.413,90.222 43.832,90.222 ; 43.413,90.23 43.832,90.23 ; 43.413,90.237 43.832,90.237 ; 43.413,94.314 43.428,94.314 ; 43.413,97.072 44.8,97.072 ; 43.421,94.322 43.436,94.322 ; 43.428,92.767 44.556,92.767 ; 43.428,94.329 43.444,94.329 ; 43.436,92.142 43.931,92.142 ; 43.436,94.337 43.459,94.337 ; 43.444,92.775 44.564,92.775 ; 43.444,94.344 43.466,94.344 ; 43.444,97.08 44.777,97.08 ; 43.451,94.352 43.474,94.352 ; 43.459,94.36 43.482,94.36 ; 43.466,92.782 44.571,92.782 ; 43.474,94.367 43.489,94.367 ; 43.474,97.088 44.747,97.088 ; 43.482,92.15 43.962,92.15 ; 43.482,92.79 44.587,92.79 ; 43.482,94.375 43.504,94.375 ; 43.489,94.383 43.512,94.383 ; 43.497,92.798 44.594,92.798 ; 43.497,94.39 43.52,94.39 ; 43.504,94.398 43.527,94.398 ; 43.504,97.095 44.716,97.095 ; 43.512,94.405 43.543,94.405 ; 43.52,92.158 43.985,92.158 ; 43.52,92.805 44.602,92.805 ; 43.52,94.413 43.55,94.413 ; 43.535,92.813 44.609,92.813 ; 43.535,94.421 43.558,94.421 ; 43.535,97.103 44.678,97.103 ; 43.543,94.428 43.565,94.428 ; 43.55,92.82 44.625,92.82 ; 43.55,94.436 43.573,94.436 ; 43.558,92.165 44.015,92.165 ; 43.558,94.444 43.588,94.444 ; 43.565,94.451 43.596,94.451 ; 43.573,88.774 43.68,88.774 ; 43.573,88.782 43.672,88.782 ; 43.573,92.828 44.632,92.828 ; 43.573,94.459 43.604,94.459 ; 43.573,97.111 44.64,97.111 ; 43.581,94.466 43.611,94.466 ; 43.588,88.767 43.687,88.767 ; 43.588,92.836 44.64,92.836 ; 43.588,94.474 43.626,94.474 ; 43.596,92.173 44.038,92.173 ; 43.604,92.843 44.647,92.843 ; 43.604,94.482 43.634,94.482 ; 43.604,97.118 44.602,97.118 ; 43.611,88.759 43.695,88.759 ; 43.611,93.773 43.733,93.773 ; 43.611,94.489 43.642,94.489 ; 43.619,88.751 43.703,88.751 ; 43.619,92.851 44.655,92.851 ; 43.619,93.765 43.847,93.765 ; 43.619,94.497 43.649,94.497 ; 43.626,92.18 44.068,92.18 ; 43.626,93.758 43.924,93.758 ; 43.626,94.505 43.665,94.505 ; 43.634,88.469 43.672,88.469 ; 43.634,88.744 43.703,88.744 ; 43.634,92.859 44.663,92.859 ; 43.634,93.75 43.992,93.75 ; 43.634,94.512 43.672,94.512 ; 43.642,88.477 43.672,88.477 ; 43.642,88.485 43.672,88.485 ; 43.642,88.492 43.672,88.492 ; 43.642,88.5 43.672,88.5 ; 43.642,88.508 43.672,88.508 ; 43.642,88.515 43.672,88.515 ; 43.642,88.523 43.672,88.523 ; 43.642,88.53 43.672,88.53 ; 43.642,88.538 43.672,88.538 ; 43.642,88.546 43.672,88.546 ; 43.642,88.553 43.672,88.553 ; 43.642,88.561 43.672,88.561 ; 43.642,88.569 43.672,88.569 ; 43.642,88.576 43.672,88.576 ; 43.642,88.584 43.672,88.584 ; 43.642,88.591 43.672,88.591 ; 43.642,88.599 43.672,88.599 ; 43.642,88.607 43.672,88.607 ; 43.642,88.614 43.672,88.614 ; 43.642,88.622 43.672,88.622 ; 43.642,88.629 43.672,88.629 ; 43.642,88.637 43.672,88.637 ; 43.642,88.645 43.672,88.645 ; 43.642,88.652 43.672,88.652 ; 43.642,88.66 43.672,88.66 ; 43.642,88.668 43.672,88.668 ; 43.642,88.675 43.672,88.675 ; 43.642,88.683 43.672,88.683 ; 43.642,88.69 43.748,88.69 ; 43.642,88.698 43.741,88.698 ; 43.642,88.706 43.733,88.706 ; 43.642,88.713 43.733,88.713 ; 43.642,88.721 43.725,88.721 ; 43.642,88.729 43.718,88.729 ; 43.642,88.736 43.71,88.736 ; 43.642,94.52 43.68,94.52 ; 43.649,92.866 44.67,92.866 ; 43.649,93.743 44.046,93.743 ; 43.649,94.527 43.687,94.527 ; 43.649,97.126 44.564,97.126 ; 43.665,92.188 44.091,92.188 ; 43.665,92.874 44.678,92.874 ; 43.665,93.735 44.091,93.735 ; 43.665,94.535 43.695,94.535 ; 43.672,94.543 43.71,94.543 ; 43.68,88.683 43.756,88.683 ; 43.68,92.881 44.686,92.881 ; 43.68,93.727 44.137,93.727 ; 43.68,94.55 43.718,94.55 ; 43.687,88.675 43.764,88.675 ; 43.687,94.558 43.725,94.558 ; 43.695,88.668 43.764,88.668 ; 43.695,92.196 44.114,92.196 ; 43.695,92.889 44.693,92.889 ; 43.695,93.72 44.175,93.72 ; 43.695,94.565 43.733,94.565 ; 43.695,97.133 44.518,97.133 ; 43.703,88.652 43.779,88.652 ; 43.703,88.66 43.771,88.66 ; 43.703,94.573 43.748,94.573 ; 43.71,88.645 43.786,88.645 ; 43.71,92.897 44.693,92.897 ; 43.71,93.712 44.213,93.712 ; 43.71,94.581 43.756,94.581 ; 43.718,88.637 43.794,88.637 ; 43.725,88.629 43.794,88.629 ; 43.725,92.203 44.137,92.203 ; 43.725,92.904 44.701,92.904 ; 43.725,93.704 44.244,93.704 ; 43.725,94.588 43.764,94.588 ; 43.733,88.614 43.809,88.614 ; 43.733,88.622 43.802,88.622 ; 43.733,94.596 43.771,94.596 ; 43.741,88.607 43.817,88.607 ; 43.741,92.912 44.708,92.912 ; 43.741,94.604 43.779,94.604 ; 43.741,97.141 44.465,97.141 ; 43.748,88.599 43.825,88.599 ; 43.748,93.697 44.274,93.697 ; 43.748,94.611 43.794,94.611 ; 43.756,88.591 43.825,88.591 ; 43.756,92.211 44.16,92.211 ; 43.756,92.92 44.716,92.92 ; 43.756,94.619 43.802,94.619 ; 43.764,88.576 43.84,88.576 ; 43.764,88.584 43.832,88.584 ; 43.764,92.927 44.724,92.927 ; 43.764,93.689 44.305,93.689 ; 43.764,94.626 43.809,94.626 ; 43.771,88.569 43.847,88.569 ; 43.771,94.634 43.817,94.634 ; 43.779,88.561 43.855,88.561 ; 43.779,92.219 44.183,92.219 ; 43.779,92.935 44.724,92.935 ; 43.786,88.553 43.855,88.553 ; 43.786,93.682 44.327,93.682 ; 43.786,94.642 43.832,94.642 ; 43.794,88.546 43.863,88.546 ; 43.794,92.942 44.731,92.942 ; 43.794,94.649 43.84,94.649 ; 43.802,88.53 43.901,88.53 ; 43.802,88.538 43.901,88.538 ; 43.802,93.674 44.358,93.674 ; 43.802,94.657 43.847,94.657 ; 43.802,97.149 44.404,97.149 ; 43.809,88.523 43.901,88.523 ; 43.809,92.226 44.198,92.226 ; 43.809,92.95 44.739,92.95 ; 43.809,94.665 43.855,94.665 ; 43.817,88.515 43.901,88.515 ; 43.817,92.958 44.739,92.958 ; 43.817,93.666 44.381,93.666 ; 43.817,94.672 43.87,94.672 ; 43.825,88.508 43.901,88.508 ; 43.825,88.774 43.946,88.774 ; 43.825,88.782 43.946,88.782 ; 43.825,94.68 43.878,94.68 ; 43.832,88.492 43.901,88.492 ; 43.832,88.5 43.901,88.5 ; 43.832,92.234 44.221,92.234 ; 43.832,92.965 44.747,92.965 ; 43.832,94.687 43.885,94.687 ; 43.84,88.485 43.901,88.485 ; 43.84,92.973 44.747,92.973 ; 43.84,93.659 44.404,93.659 ; 43.847,88.477 43.901,88.477 ; 43.847,88.767 43.916,88.767 ; 43.847,94.695 43.893,94.695 ; 43.855,88.469 43.901,88.469 ; 43.855,92.981 44.754,92.981 ; 43.855,93.651 44.419,93.651 ; 43.855,94.703 43.901,94.703 ; 43.863,88.751 43.901,88.751 ; 43.863,88.759 43.908,88.759 ; 43.863,92.241 44.244,92.241 ; 43.863,94.71 43.916,94.71 ; 43.87,88.546 43.901,88.546 ; 43.87,88.553 43.901,88.553 ; 43.87,88.561 43.901,88.561 ; 43.87,88.569 43.901,88.569 ; 43.87,88.576 43.901,88.576 ; 43.87,88.584 43.901,88.584 ; 43.87,88.591 43.901,88.591 ; 43.87,88.599 43.901,88.599 ; 43.87,88.607 43.901,88.607 ; 43.87,88.614 43.901,88.614 ; 43.87,88.622 43.901,88.622 ; 43.87,88.629 43.901,88.629 ; 43.87,88.637 43.901,88.637 ; 43.87,88.645 43.901,88.645 ; 43.87,88.652 43.901,88.652 ; 43.87,88.66 43.901,88.66 ; 43.87,88.668 43.901,88.668 ; 43.87,88.675 43.901,88.675 ; 43.87,88.683 43.901,88.683 ; 43.87,88.69 43.901,88.69 ; 43.87,88.698 43.901,88.698 ; 43.87,88.706 43.901,88.706 ; 43.87,88.713 43.901,88.713 ; 43.87,88.721 43.901,88.721 ; 43.87,88.729 43.901,88.729 ; 43.87,88.736 43.901,88.736 ; 43.87,88.744 43.901,88.744 ; 43.87,92.988 44.754,92.988 ; 43.87,93.643 44.442,93.643 ; 43.87,94.718 43.924,94.718 ; 43.878,92.996 44.762,92.996 ; 43.878,94.725 43.931,94.725 ; 43.878,97.156 44.32,97.156 ; 43.885,92.249 44.259,92.249 ; 43.885,93.636 44.465,93.636 ; 43.885,94.733 43.939,94.733 ; 43.893,93.003 44.762,93.003 ; 43.893,94.741 43.954,94.741 ; 43.901,93.011 44.769,93.011 ; 43.901,93.628 44.48,93.628 ; 43.908,92.257 44.282,92.257 ; 43.908,93.019 44.769,93.019 ; 43.908,93.621 44.495,93.621 ; 43.908,94.748 43.962,94.748 ; 43.916,94.756 43.969,94.756 ; 43.924,93.026 44.777,93.026 ; 43.924,93.613 44.51,93.613 ; 43.924,94.764 43.977,94.764 ; 43.931,89.574 44.145,89.574 ; 43.931,89.582 44.145,89.582 ; 43.931,89.59 44.145,89.59 ; 43.931,89.597 44.145,89.597 ; 43.931,89.605 44.145,89.605 ; 43.931,89.612 44.145,89.612 ; 43.931,89.62 44.145,89.62 ; 43.931,89.628 44.145,89.628 ; 43.931,89.635 44.145,89.635 ; 43.931,92.264 44.305,92.264 ; 43.931,93.034 44.777,93.034 ; 43.931,93.605 44.526,93.605 ; 43.931,94.771 43.985,94.771 ; 43.939,89.559 44.137,89.559 ; 43.939,89.567 44.145,89.567 ; 43.939,89.643 44.145,89.643 ; 43.939,89.651 44.137,89.651 ; 43.939,93.041 44.785,93.041 ; 43.939,94.779 44,94.779 ; 43.946,89.544 44.129,89.544 ; 43.946,89.552 44.137,89.552 ; 43.946,89.658 44.137,89.658 ; 43.946,89.666 44.129,89.666 ; 43.946,93.598 44.541,93.598 ; 43.946,94.786 44.007,94.786 ; 43.954,89.536 44.122,89.536 ; 43.954,89.673 44.122,89.673 ; 43.954,92.272 44.32,92.272 ; 43.954,93.049 44.785,93.049 ; 43.954,93.59 44.556,93.59 ; 43.954,94.794 44.015,94.794 ; 43.962,89.529 44.122,89.529 ; 43.962,89.681 44.122,89.681 ; 43.962,93.057 44.785,93.057 ; 43.962,93.582 44.571,93.582 ; 43.962,94.802 44.023,94.802 ; 43.969,89.521 44.106,89.521 ; 43.969,89.689 44.114,89.689 ; 43.969,93.064 44.792,93.064 ; 43.977,89.513 44.099,89.513 ; 43.977,89.696 44.099,89.696 ; 43.977,92.279 44.343,92.279 ; 43.977,93.072 44.792,93.072 ; 43.977,93.575 44.587,93.575 ; 43.977,94.809 44.038,94.809 ; 43.985,89.308 44.198,89.308 ; 43.985,89.315 44.198,89.315 ; 43.985,89.323 44.198,89.323 ; 43.985,89.331 44.198,89.331 ; 43.985,89.338 44.198,89.338 ; 43.985,89.346 44.198,89.346 ; 43.985,89.353 44.198,89.353 ; 43.985,89.361 44.198,89.361 ; 43.985,89.369 44.198,89.369 ; 43.985,89.376 44.198,89.376 ; 43.985,89.833 44.198,89.833 ; 43.985,89.841 44.198,89.841 ; 43.985,89.849 44.198,89.849 ; 43.985,89.856 44.198,89.856 ; 43.985,89.864 44.198,89.864 ; 43.985,89.872 44.198,89.872 ; 43.985,89.879 44.198,89.879 ; 43.985,89.887 44.198,89.887 ; 43.985,89.894 44.198,89.894 ; 43.985,89.902 44.198,89.902 ; 43.985,93.08 44.792,93.08 ; 43.985,93.567 44.594,93.567 ; 43.985,94.817 44.046,94.817 ; 43.992,89.292 44.19,89.292 ; 43.992,89.3 44.19,89.3 ; 43.992,89.384 44.19,89.384 ; 43.992,89.391 44.19,89.391 ; 43.992,89.506 44.084,89.506 ; 43.992,89.704 44.091,89.704 ; 43.992,89.818 44.19,89.818 ; 43.992,89.826 44.19,89.826 ; 43.992,89.91 44.19,89.91 ; 43.992,89.917 44.19,89.917 ; 43.992,93.56 44.609,93.56 ; 43.992,94.825 44.053,94.825 ; 44,89.277 44.183,89.277 ; 44,89.285 44.183,89.285 ; 44,89.399 44.183,89.399 ; 44,89.407 44.183,89.407 ; 44,89.803 44.183,89.803 ; 44,89.811 44.183,89.811 ; 44,89.925 44.183,89.925 ; 44,89.933 44.183,89.933 ; 44,92.287 44.358,92.287 ; 44,93.087 44.8,93.087 ; 44,93.552 44.617,93.552 ; 44,94.832 44.061,94.832 ; 44.007,89.27 44.175,89.27 ; 44.007,89.414 44.175,89.414 ; 44.007,89.795 44.175,89.795 ; 44.007,89.94 44.175,89.94 ; 44.007,93.095 44.8,93.095 ; 44.007,94.84 44.076,94.84 ; 44.015,89.262 44.167,89.262 ; 44.015,89.422 44.167,89.422 ; 44.015,89.498 44.061,89.498 ; 44.015,89.712 44.068,89.712 ; 44.015,89.788 44.167,89.788 ; 44.015,89.948 44.167,89.948 ; 44.015,93.102 44.8,93.102 ; 44.015,93.544 44.632,93.544 ; 44.015,94.847 44.084,94.847 ; 44.015,97.164 44.19,97.164 ; 44.023,89.43 44.16,89.43 ; 44.023,89.78 44.16,89.78 ; 44.023,89.955 44.16,89.955 ; 44.023,92.295 44.373,92.295 ; 44.023,93.11 44.808,93.11 ; 44.023,93.537 44.64,93.537 ; 44.023,94.855 44.091,94.855 ; 44.03,89.254 44.16,89.254 ; 44.03,93.118 44.808,93.118 ; 44.03,93.529 44.655,93.529 ; 44.038,89.247 44.145,89.247 ; 44.038,89.437 44.152,89.437 ; 44.038,89.772 44.145,89.772 ; 44.038,89.963 44.145,89.963 ; 44.038,92.302 44.396,92.302 ; 44.038,93.125 44.808,93.125 ; 44.038,93.522 44.663,93.522 ; 44.038,94.863 44.099,94.863 ; 44.046,93.133 44.808,93.133 ; 44.046,93.141 44.815,93.141 ; 44.046,93.514 44.67,93.514 ; 44.046,94.87 44.106,94.87 ; 44.053,89.239 44.129,89.239 ; 44.053,89.445 44.129,89.445 ; 44.053,89.765 44.129,89.765 ; 44.053,89.971 44.129,89.971 ; 44.053,93.148 44.815,93.148 ; 44.053,93.506 44.678,93.506 ; 44.053,94.878 44.122,94.878 ; 44.061,92.31 44.411,92.31 ; 44.061,93.156 44.815,93.156 ; 44.061,93.491 44.701,93.491 ; 44.061,93.499 44.686,93.499 ; 44.061,94.886 44.129,94.886 ; 44.068,93.163 44.815,93.163 ; 44.068,93.483 44.708,93.483 ; 44.068,94.893 44.137,94.893 ; 44.076,93.171 44.815,93.171 ; 44.076,93.179 44.815,93.179 ; 44.076,93.476 44.716,93.476 ; 44.076,94.901 44.145,94.901 ; 44.084,92.318 44.427,92.318 ; 44.084,93.186 44.815,93.186 ; 44.084,93.461 44.724,93.461 ; 44.084,93.468 44.716,93.468 ; 44.084,94.908 44.16,94.908 ; 44.091,93.194 44.815,93.194 ; 44.091,93.201 44.823,93.201 ; 44.091,93.453 44.731,93.453 ; 44.091,96.867 45.31,96.867 ; 44.099,92.325 44.442,92.325 ; 44.099,93.209 44.823,93.209 ; 44.099,93.217 44.823,93.217 ; 44.099,93.438 44.747,93.438 ; 44.099,93.445 44.739,93.445 ; 44.099,94.916 44.167,94.916 ; 44.106,93.224 44.823,93.224 ; 44.106,93.232 44.823,93.232 ; 44.106,93.422 44.754,93.422 ; 44.106,93.43 44.754,93.43 ; 44.106,94.924 44.175,94.924 ; 44.114,93.24 44.823,93.24 ; 44.114,93.247 44.815,93.247 ; 44.114,93.407 44.769,93.407 ; 44.114,93.415 44.762,93.415 ; 44.114,94.931 44.183,94.931 ; 44.122,92.333 44.457,92.333 ; 44.122,93.255 44.815,93.255 ; 44.122,93.262 44.815,93.262 ; 44.122,93.27 44.815,93.27 ; 44.122,93.278 44.815,93.278 ; 44.122,93.377 44.785,93.377 ; 44.122,93.384 44.777,93.384 ; 44.122,93.392 44.777,93.392 ; 44.122,93.4 44.769,93.4 ; 44.122,94.939 44.19,94.939 ; 44.129,93.285 44.815,93.285 ; 44.129,93.293 44.815,93.293 ; 44.129,93.301 44.808,93.301 ; 44.129,93.308 44.808,93.308 ; 44.129,93.316 44.808,93.316 ; 44.129,93.323 44.808,93.323 ; 44.129,93.331 44.8,93.331 ; 44.129,93.339 44.8,93.339 ; 44.129,93.346 44.8,93.346 ; 44.129,93.354 44.792,93.354 ; 44.129,93.362 44.792,93.362 ; 44.129,93.369 44.785,93.369 ; 44.129,94.946 44.206,94.946 ; 44.137,92.34 44.48,92.34 ; 44.137,94.954 44.213,94.954 ; 44.145,94.962 44.221,94.962 ; 44.152,92.348 44.495,92.348 ; 44.16,88.774 44.312,88.774 ; 44.16,88.782 44.312,88.782 ; 44.16,94.969 44.228,94.969 ; 44.167,94.977 44.244,94.977 ; 44.175,92.356 44.51,92.356 ; 44.175,94.985 44.251,94.985 ; 44.175,96.859 45.326,96.859 ; 44.183,94.992 44.259,94.992 ; 44.19,88.767 44.289,88.767 ; 44.19,89.117 44.411,89.117 ; 44.19,89.125 44.411,89.125 ; 44.19,89.132 44.411,89.132 ; 44.19,89.14 44.411,89.14